# Altium PCB WGPIB.PcbDoc
Units mm, origin at the board's own origin, x right, y up, seen from the top; angles counter-clockwise.
Board outline 64 x 55 mm, 2 copper layers (Top Layer, Bottom Layer); 60 components, 74 nets, 275 pads, 101 vias.
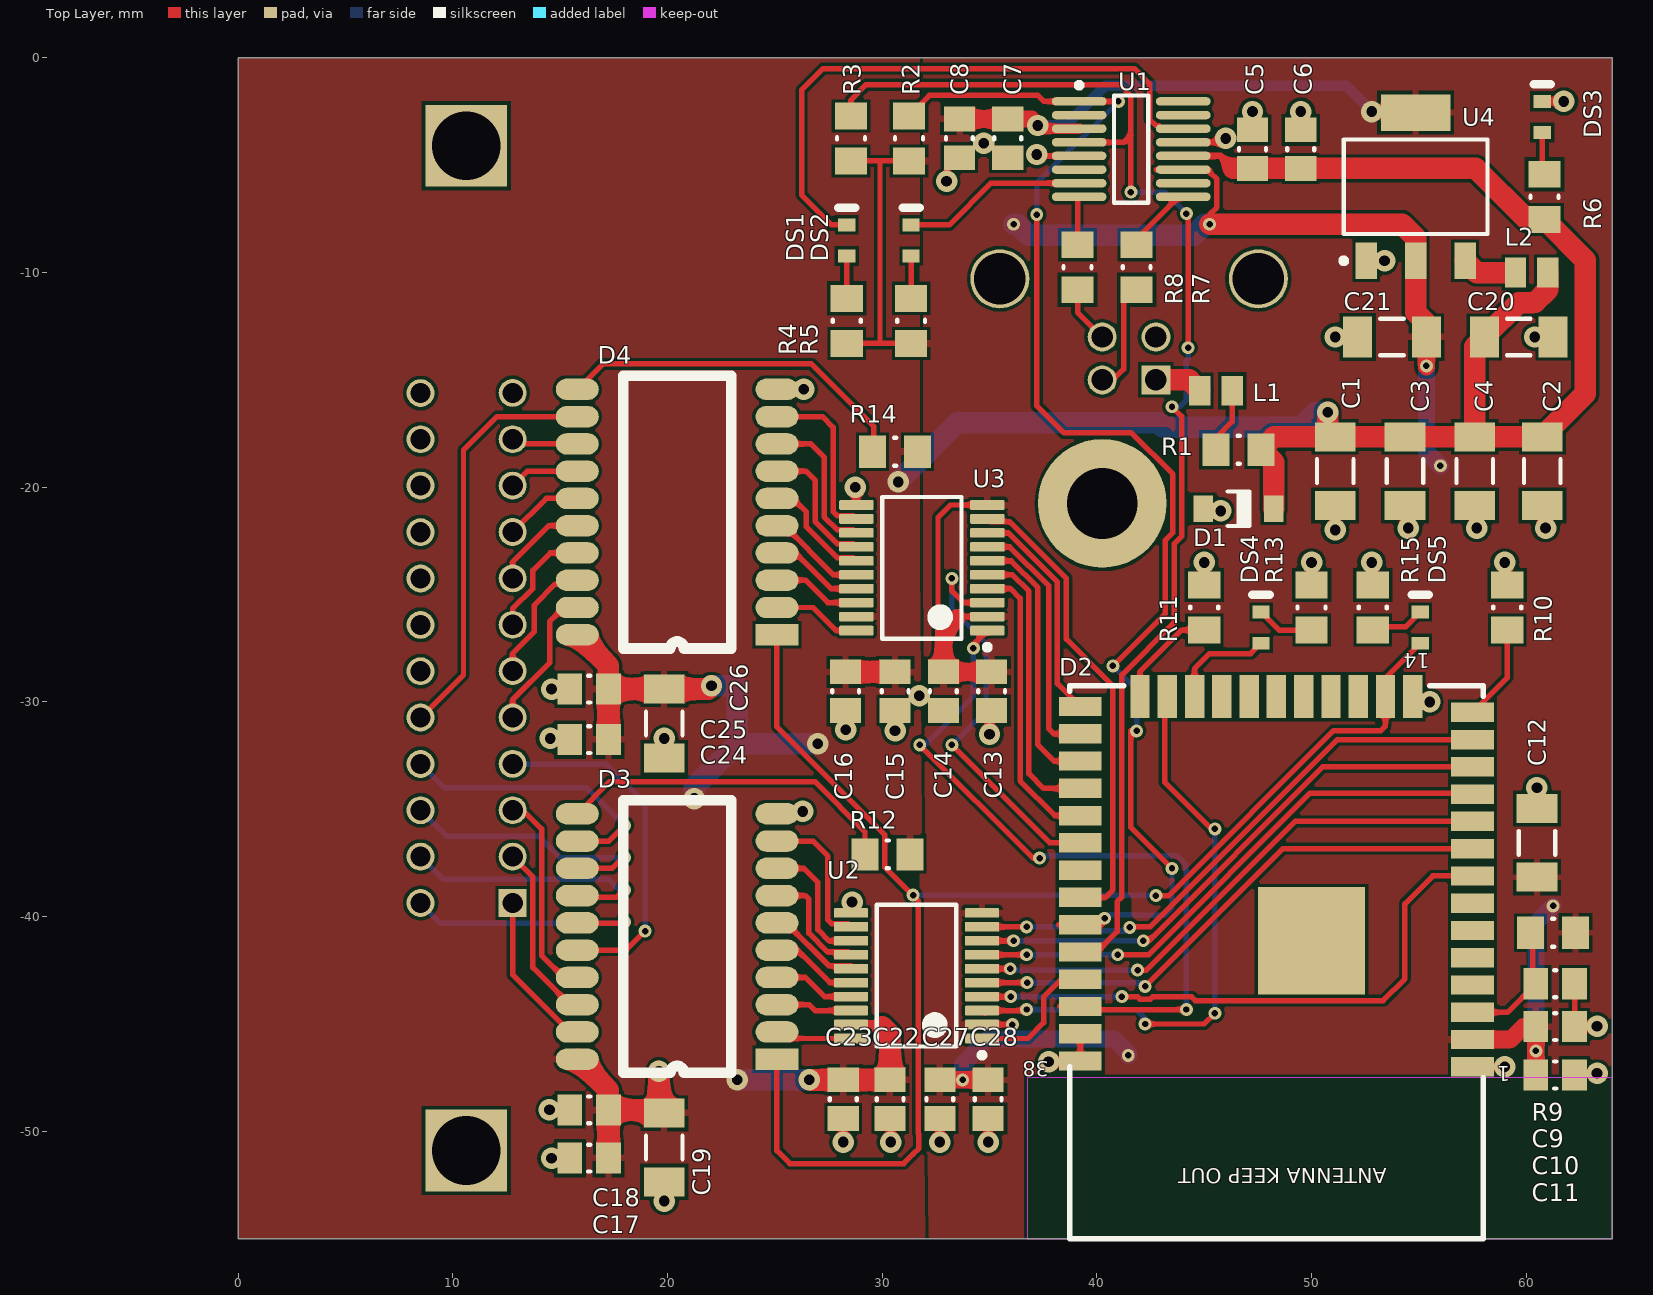
[diagram p0: Top Layer view]
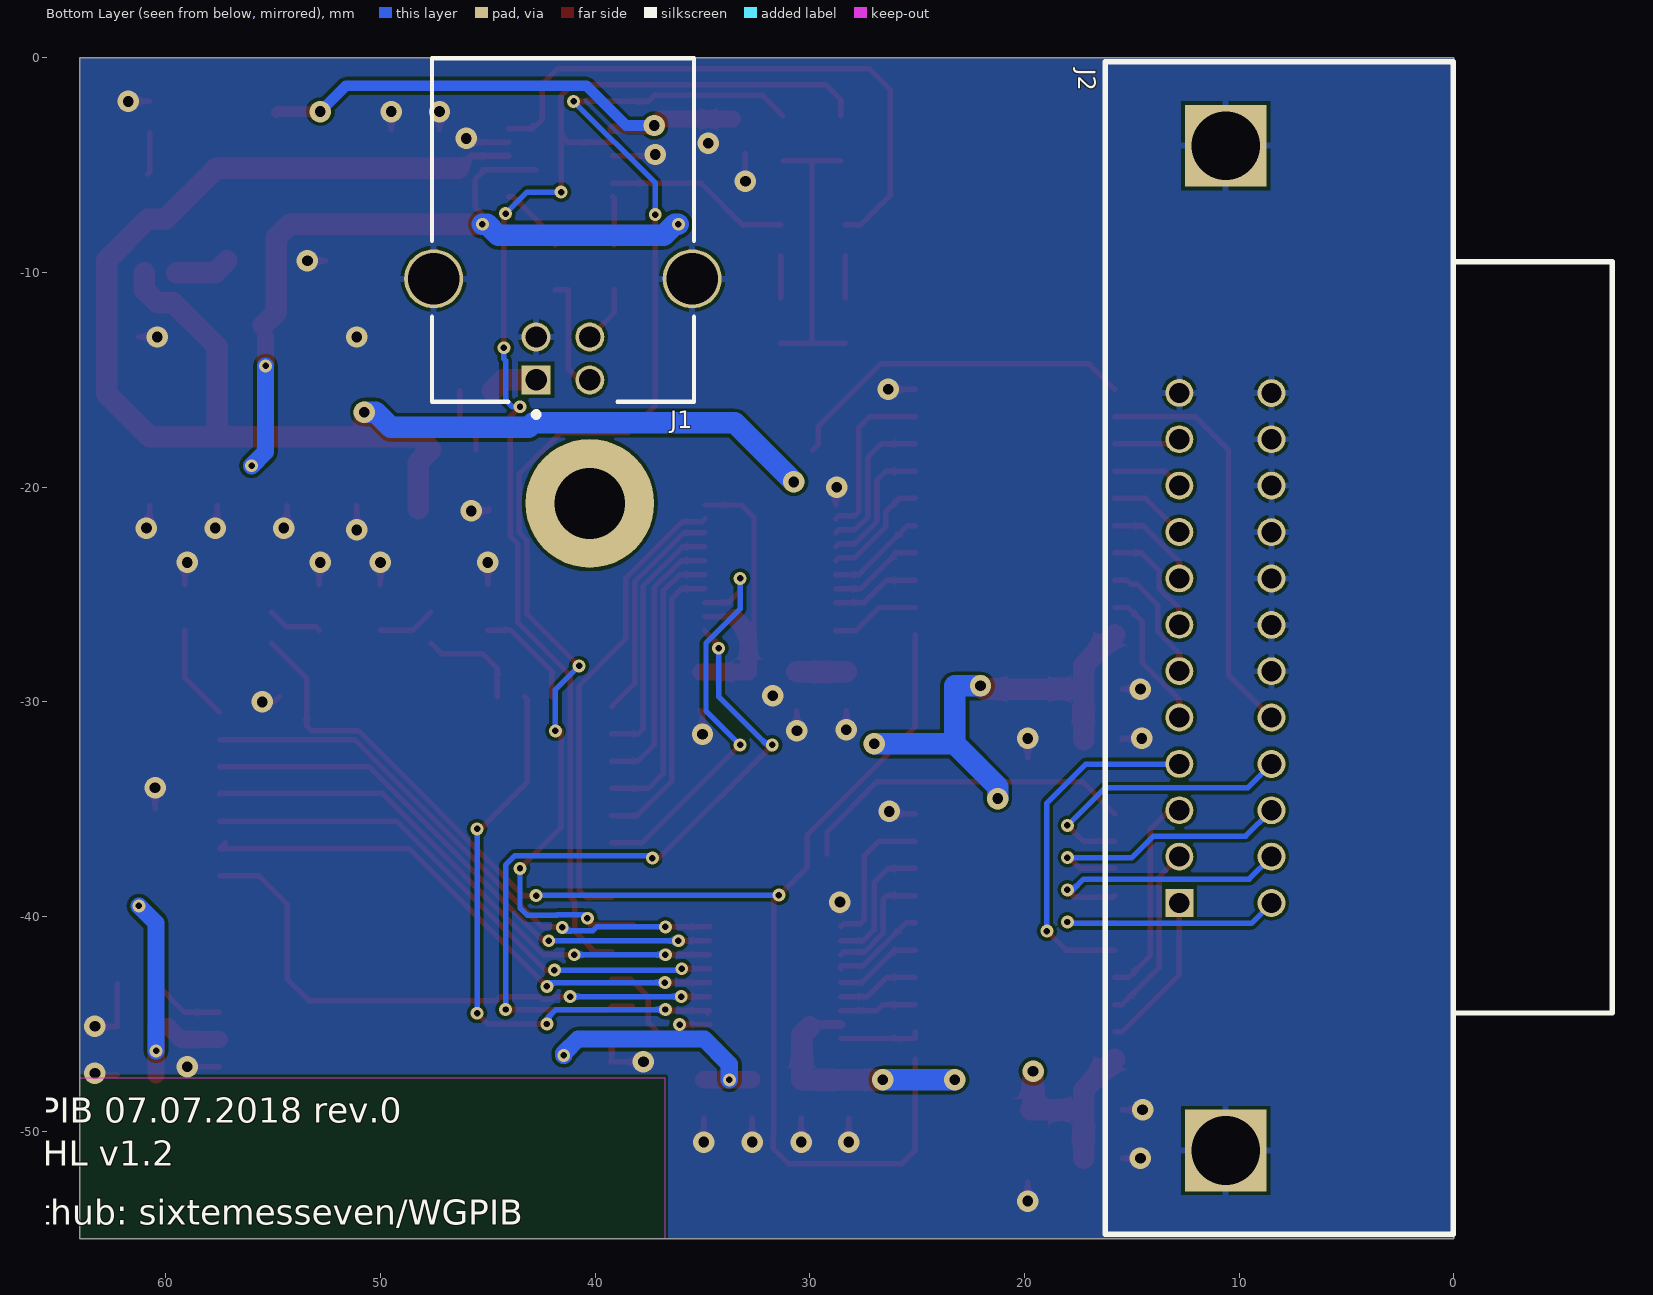
[diagram p1: Bottom Layer view, seen from below]

## Layer stack, top to bottom
Top Solder: solder mask 0.0102, Solder Resist, Dk 3.5
Top Layer: signal copper 0.0356
Dielectric 1: dielectric 0.32, FR-4, Dk 4.8
Bottom Layer: signal copper 0.0356
Bottom Solder: solder mask 0.0102, Solder Resist, Dk 3.5

## Board outline
64,0 64,-55 0,-55 0,0

## Design rules (kind name [scope] priority, off if disabled: settings)
Clearance [All] p1: gap=0.16 ignorepadtopadclearanceinfootprint=FALSE
PolygonConnect [All] p1: thpad.connectstyle=Relief thpad.reliefconductorwidth=0.3 thpad.reliefentries=4 thpad.polygonreliefangle="90 Angle" thpad.airgapwidth=0.16 smdpad.connectstyle=Relief smdpad.reliefconductorwidth=0.3 smdpad.reliefentries=4 smdpad.polygonreliefangle="90 Angle" smdpad.airgapwidth=0.16 via.connectstyle=Direct via.reliefconductorwidth=0.254 via.reliefentries=4 via.polygonreliefangle="90 Angle" via.airgapwidth=0.254
RoutingVias [All] p1: holewidth=0.3 width=0.6 viastyle="Through Hole" minholewidth=0.3 minwidth=0.6 maxholewidth=0.711 maxwidth=1.27
SolderMaskExpansion [All] p1: expansion=0.102
Width [All] p1: maxlimit=5 minlimit=0.254 preferedwidth=0.254
30 further rules are at their usual default settings.

## Classes and differential pairs
component class WGPIB: C9 C10 C11 C12 C13 C14 C15 C16 C17 C18 C19 C20 C21 C22 C23 C24 C25 C26 C27 C28 D2 D3 D4 DS4 DS5 J2 L2 R9 R10 R11 R12 R13 R14 R15 U2 U3 U4
component class D?: C1 C2 C3 C4 C5 C6 C7 C8 D1 DS1 DS2 DS3 J1 L1 R1 R2 R3 R4 R5 R6 R7 R8 U1

## Components (designator, comment, footprint, x,y, rotation, side; value= is the part's Value field where it differs from the comment)
C1 "22uF" CAPC1206(3216)190_M 51.1,-19.25 r90 top
C2 "22uF" CAPC1206(3216)190_M 60.75,-19.25 r90 top
C3 "22uF" CAPC1206(3216)190_M 54.35,-19.25 r90 top
C4 "22uF" CAPC1206(3216)190_M 57.6,-19.25 r90 top
C5 "100nF" CAPC0805(2012)145_N 47.25,-4.25 r270 top
C6 "1uF" CAPC0805(2012)145_N 49.5,-4.25 r270 top value=100nF
C7 "100nF" CAPC0805(2012)145_N 35.85,-3.75 r90 top
C8 "1uF" CAPC0805(2012)145_N 33.6,-3.75 r90 top value=100nF
C9 "100nF" CAPC0805(2012)145_N 61.35,-43.125 r180 top
C10 "100nF" CAPC0805(2012)145_N 61.35,-45.125 r180 top
C11 "1uF" CAPC0805(2012)145_N 61.35,-47.375 r180 top value=100nF
C12 "22uF" CAPC1206(3216)190_M 60.5,-36.564 r270 top
C13 "100nF" CAPC0805(2012)145_N 35.1,-29.5 r90 top
C14 "1uF" CAPC0805(2012)145_N 32.85,-29.5 r90 top value=100nF
C15 "100nF" CAPC0805(2012)145_N 30.6,-29.5 r90 top
C16 "1uF" CAPC0805(2012)145_N 28.3,-29.5 r90 top value=100nF
C17 "100nF" CAPC0805(2012)145_N 16.35,-51.25 r0 top
C18 "1uF" CAPC0805(2012)145_N 16.35,-49 r0 top value=100nF
C19 "22uF" CAPC1206(3216)190_M 19.85,-50.75 r90 top
C20 "22uF" CAPC1206(3216)190_M 59.65,-13 r180 top
C21 "22uF" CAPC1206(3216)190_M 53.75,-13 r0 top
C22 "100nF" CAPC0805(2012)145_N 30.37,-48.5 r90 top
C23 "1uF" CAPC0805(2012)145_N 28.188,-48.5 r90 top value=100nF
C24 "100nF" CAPC0805(2012)145_N 16.35,-31.75 r0 top
C25 "1uF" CAPC0805(2012)145_N 16.35,-29.4 r0 top value=100nF
C26 "22uF" CAPC1206(3216)190_M 19.85,-31 r90 top
C27 "100nF" CAPC0805(2012)145_N 32.687,-48.5 r90 top
C28 "1uF" CAPC0805(2012)145_N 34.937,-48.5 r90 top value=100nF
D1 "MMSD4148T3G" ONSC-SOD123-2-425G-04_V 46.6,-21 r180 top
D2 "ESP-WROOM-32" ESP-WROOM-32 57.498,-46.994 r180 top locked
D3 "SN75160BDWR" SOIC-20 25.1,-46.64 r180 top locked
D4 "SN75160BDWR" SOIC-20 25.1,-26.87 r180 top
DS1 "TLMS1100-GS08" VISH-TLMX1100_V 28.35,-8.5 r90 top
DS2 "TLMS1100-GS08" VISH-TLMX1100_V 31.35,-8.5 r90 top
DS3 "TLMS1100-GS08" VISH-TLMX1100_V 60.75,-2.75 r90 top
DS4 "TLMS1100-GS08" VISH-TLMX1100_V 47.65,-26.54 r90 top
DS5 "TLMS1100-GS08" VISH-TLMX1100_V 55.065,-26.54 r90 top
J1 "61729-0010BLF" FCI-61729-0010BLF-6_V 41.496,-8.01 r0 bottom locked
J2 "GPIB" "GPIB THT" 10.631,-27.489 r90 bottom
L1 "FBMJ2125HM210NT" INDC2013X105X50LL20T30 45.55,-15.501 r0 top
L2 "FBMJ2125HM210NT" INDC2013X105X50LL20T30 60.25,-10 r180 top
R1 "FUSE" RESC0805(2012)_M 46.6,-18.25 r0 top value="33.00 Ohm"
R2 "10k" RESC0805(2012)_M 31.25,-3.75 r270 top value="33.00 Ohm"
R3 "10k" RESC0805(2012)_M 28.55,-3.75 r270 top value="33.00 Ohm"
R4 "330" RESC0805(2012)_M 28.35,-12.25 r270 top value="33.00 Ohm"
R5 "330" RESC0805(2012)_M 31.35,-12.25 r270 top value="33.00 Ohm"
R6 "330" RESC0805(2012)_M 60.85,-6.472 r270 top value="33.00 Ohm"
R7 "33" RESC0805(2012)_M 41.85,-9.75 r90 top value="33.00 Ohm"
R8 "33" RESC0805(2012)_M 39.1,-9.75 r90 top value="33.00 Ohm"
R9 "10k" RESC0805(2012)_M 61.25,-40.75 r0 top value="33.00 Ohm"
R10 "10k" RESC0805(2012)_M 59.12,-25.6 r270 top value="33.00 Ohm"
R11 "10k" RESC0805(2012)_M 45,-25.6 r270 top value="33.00 Ohm"
R12 "10k" RESC0805(2012)_M 30.25,-37.1 r180 top value="33.00 Ohm"
R13 "330" RESC0805(2012)_M 50,-25.6 r270 top value="33.00 Ohm"
R14 "10k" RESC0805(2012)_M 30.6,-18.341 r180 top value="33.00 Ohm"
R15 "330" RESC0805(2012)_M 52.85,-25.6 r270 top value="33.00 Ohm"
U1 "FT230XS-R" SSOP-16_M 41.6,-4.25 r0 top
U2 "TXS0108EPWR" PW0020A_M 31.6,-42.75 r180 top
U3 "TXS0108EPWR" PW0020A_M 31.85,-23.75 r180 top
U4 "LT1117CST-3.3" LT-ST-3-SOT-223_M 54.85,-6 r90 top

## Footprints (in the part's own frame and the unit in brackets; to place one, negate y for a bottom-side part, rotate by r counter-clockwise, add the part's x,y. Pads: shape width x height; smd on the part's side, far side on the other; paste and mask are expansions set on the pad)
CAPC0805(2012)145_N [mm] "Chip Capacitor, Body 2.0x1.2mm, Height 1.45mm, IPC Medium Density"
  rect 1.15x1.45 smd: 1(-0.9,0) 2(0.9,0)
  silkscreen extent -0.05,-0.62 0.05,0.62, body extent -1.1,-0.72 1.1,0.73, height 1.45
CAPC1206(3216)190_M [mm] "Chip Capacitor, Body 3.2x1.6mm, Height 1.9mm, IPC Low Density"
  rect 1.35x1.9 smd: 1(-1.6,0) 2(1.6,0)
  silkscreen extent -0.55,-0.85 0.55,0.85, body extent -1.7,-0.9 1.7,0.9, height 1.9
ESP-WROOM-32 [mm] "OEM_Module"
  rect 2x0.9 smd: 1(0,0) 2(0,-1.27) 3(0,-2.54) 4(0,-3.81) 5(0,-5.08) 6(0,-6.35) 7(0,-7.62) 8(0,-8.89) 9(0,-10.16) 10(0,-11.43) 11(0,-12.7) 12(0,-13.97) 13(0,-15.24) 14(0,-16.51) 26(18.27,-16.78) 27(18.27,-15.51) 28(18.27,-14.24) 29(18.27,-12.97) 30(18.27,-11.7) 31(18.27,-10.43) 32(18.27,-9.16) 33(18.27,-7.89) 34(18.27,-6.62) 35(18.27,-5.35) 36(18.27,-4.08) 37(18.27,-2.81) 38(18.27,-1.54) 39(18.27,-0.27)
  rect 0.9x2 smd: 15(2.785,-17.24) 16(4.055,-17.24) 17(5.325,-17.24) 18(6.595,-17.24) 19(7.865,-17.24) 20(9.135,-17.24) 21(10.405,-17.24) 22(11.675,-17.24) 23(12.945,-17.24) 24(14.215,-17.24) 25(15.485,-17.24)
  rect 5x5 smd mask-2: PAD(7.498,-5.869)
  silkscreen extent -0.5,-17.75 18.75,8
FCI-61729-0010BLF-6_V [mm] "Through Hole, 6-Leads, Body 12.2x16mm"
  rect 1.35x1.35 hole 1: 1(1.254,6.99)
  round 1.35 hole 1: 2(-1.246,6.99) 3(-1.246,4.99) 4(1.254,4.99)
  round 2.75 hole 2.4: MH1(-6.016,2.28) MH2(6.024,2.28)
  silkscreen extent -6.1,-8 6.1,8.72, body extent -7.17,-8 7.17,8, height 11.14
"GPIB THT" [mm] "DXP://VaultExplorer:Navigate_URL?Plugin=Search&VaultGUID=B7D15EC3-160A-466F-A46C-7801FE6295A7&SavedSearchGUID=&GenericFilter=DXP://VaultExplorer:Navigate_URL?VaultGUID=B7D15EC3-160A-466F-A46C-7801FE6295A7&Plugin=Folders&FolderPath=112-024-113r001&Nav_ForceRefresh:=True&UserDefinedBrowseItemsOption_0:=0&UserDefinedBrowseItemsOption_1:=-1&UserDefinedBrows112-024-113r001"
  rect 1.3x1.3 hole 0.94: 1(-11.875,2.159)
  round 1.3 hole 0.94: 2(-9.715,2.159) 3(-7.555,2.159) 4(-5.395,2.159) 5(-3.235,2.159) 6(-1.075,2.159) 7(1.085,2.159) 8(3.245,2.159) 9(5.405,2.159) 10(7.565,2.159) 11(9.725,2.159) 12(11.885,2.159) 13(-11.875,-2.131) 14(-9.716,-2.131) 15(-7.557,-2.131) 16(-5.398,-2.131) 17(-3.239,-2.131) 18(-1.08,-2.131) 19(1.079,-2.131) 20(3.238,-2.131) 21(5.397,-2.131) 22(7.565,-2.131) 23(9.725,-2.131) 24(11.874,-2.131)
  rect 3.81x3.81 hole 3.2: PAD(-23.4,0) PAD(23.4,0)
  silkscreen extent -27.3,-18 27.3,5.6
INDC2013X105X50LL20T30 [mm] "Chip Inductor, 2-Leads, Body 2.2x1.45mm, IPC High Density"
  rect 0.99x1.39 smd: 1(-0.755,0) 2(0.755,0)
  body extent -1.1,-0.72 1.1,0.72, height 1.05
LT-ST-3-SOT-223_M [mm] "SOT223, 4-Leads, Body 6.505x3.505mm, Pitch 2.3mm, IPC Low Density"
  rect 1.7x1 smd: 1(-3.45,2.3) 2(-3.45,0) 3(-3.45,-2.3)
  rect 1.7x3.25 smd: 4(3.45,0)
  silkscreen extent -3.57,-3.35 2.2,3.47, body extent -1.86,-3.35 1.86,3.35, height 1.8
ONSC-SOD123-2-425G-04_V [mm] "SOD123, 2-Leads, Body 2.69x1.6mm, Height 1.35mm"
  rect 0.915x1.22 smd: 1(-1.637,0) 2(1.637,0)
  silkscreen extent -0.5,-0.8 0.5,0.8, body extent -1.35,-0.8 1.35,0.8, height 1.35
PW0020A_M [mm] "SOP, 20-Leads, Body 6.6x4.5mm, Pitch 0.65mm, IPC Low Density"
  rrect22% 1.6x0.45 smd: 1(-3.05,2.925) 2(-3.05,2.275) 3(-3.05,1.625) 4(-3.05,0.975) 5(-3.05,0.325) 6(-3.05,-0.325) 7(-3.05,-0.975) 8(-3.05,-1.625) 9(-3.05,-2.275) 10(-3.05,-2.925) 11(3.05,-2.925) 12(3.05,-2.275) 13(3.05,-1.625) 14(3.05,-0.975) 15(3.05,-0.325) 16(3.05,0.325) 17(3.05,0.975) 18(3.05,1.625) 19(3.05,2.275) 20(3.05,2.925)
  silkscreen extent -3.18,-3.3 1.85,3.82, body extent -3.21,-3.25 3.21,3.25, height 1
RESC0805(2012)_M [mm] "Chip Resistor, Body 2.0x1.3mm, IPC Low Density"
  rect 1.25x1.5 smd: 1(-1.05,0) 2(1.05,0)
  silkscreen extent -0.05,-0.65 0.05,0.65, body extent -1.1,-0.67 1.1,0.67, height 0.7
SOIC-20 [mm]
  rect 2x1 smd: 1(0,0)
  oval 2x1 smd: 2(0,-1.27) 3(0,-2.54) 4(0,-3.81) 5(0,-5.08) 6(0,-6.35) 7(0,-7.62) 8(0,-8.89) 9(0,-10.16) 10(0,-11.43) 11(9.3,-11.43) 12(9.3,-10.16) 13(9.3,-8.89) 14(9.3,-7.62) 15(9.3,-6.35) 16(9.3,-5.08) 17(9.3,-3.81) 18(9.3,-2.54) 19(9.3,-1.27) 20(9.3,0)
  silkscreen extent 2.13,-12.07 7.17,0.64
SSOP-16_M [mm] "SOP, 16-Leads, Body 4.9x3.9mm, Pitch 0.635mm, IPC Low Density"
  oval 2.55x0.4 smd: 1(-2.425,2.223) 2(-2.425,1.588) 3(-2.425,0.953) 4(-2.425,0.318) 5(-2.425,-0.317) 6(-2.425,-0.952) 7(-2.425,-1.587) 8(-2.425,-2.222) 9(2.425,-2.222) 10(2.425,-1.587) 11(2.425,-0.952) 12(2.425,-0.317) 13(2.425,0.318) 14(2.425,0.953) 15(2.425,1.588) 16(2.425,2.223)
  silkscreen extent -2.55,-2.5 0.8,3.1, body extent -1.99,-2.5 1.99,2.5, height 1.76
VISH-TLMX1100_V [mm] "SMD, 2-Leads, Body 1.6x0.8mm"
  rect 0.6x0.8 smd: 1(-0.725,0) 2(0.725,0)
  silkscreen extent 1.53,-0.4 1.53,0.4, body extent -0.8,-0.4 0.8,0.4, height 0.65

## Part data
C1 C2 C3 C4 C12 C19 C20 C21 C26: library part CMP-1037-04993-1, Case-EIA=1206, Case-Metric=3216, Rated Voltage="16 V", Tolerance=±20%, Max Thickness="1.9 mm", Technology=SMT
C5 C6 C7 C8 C9 C10 C11 C13 C14 C15 C16 C17 C18 C22 C23 C24 C25 C27 C28: library part CMP-1036-04431-1, Case-EIA=0805, Case-Metric=2012, Rated Voltage="100 V", Tolerance=±20%, Max Thickness="1.45 mm", Technology=SMT
D1: library part CMP-0895-00002-1, Manufacturer="ON Semiconductor", Temperature Range="-55 to 150 degC", CD (Max)="4 pF", ComponentLink1Description="Manufacturer URL", ComponentLink1URL=http://www.onsemi.com/, ComponentLink2Description=Datasheet, ComponentLink2URL=http://www.onsemi.com/pub_link/Collateral/MMSD4148T1-D.PDF, ComponentLink3Description="Package Specification", ComponentLink3URL=http://www.onsemi.com/pub_link/Collateral/425-04.PDF, DatasheetVersion="Rev. 11", IR @ VR="75 V (Max)=50 uA", Mounting Technology="Surface Mount", PackageDescription="2-Pin SOD123, Body 2.69 x 1.6 mm, Height 1.35 mm", PackageReference=SOD123-2-425G-04, PackageVersion="Rev. 04G", Packing="Tape and Reel", PartNumber=MMSD4148T3G, PD (Max)="425 mW", RoHS=TRUE, Trr (Max)="4 ns", VBR (Min)="100 V", VF (Max)="1 A"
D2: "ESP32 Module"
DS1 DS2 DS3 DS4 DS5: library part CMP-1666-00027-1, "LED, RED, 2.1 V, -40 to 100 degC, 2-Pin SMD (0603), RoHS, Tape and Reel", Capacitance="12 pF", Case/Package=0603, Case Code (Metric)=1608, Max Operating Temperature=125degC, Min Operating Temperature=-55degC, Package Quantity=4000, Resistance="100000000000 Ohm", Tolerance=5%, Type (Capacitors)=C0G, Voltage Rating="50 V", Case Code (Imperial)=0603, ComponentLink1Description="Manufacturer URL", ComponentLink1URL=http://www.vishay.com/, ComponentLink2Description=Datasheet, ComponentLink2URL=http://www.vishay.com/docs/83173/tlmb1100.pdf, DatasheetVersion="Rev. 2.7, 03/2016", Height="0.8 mm", Length="1.6 mm", Mount="Surface Mount", PackageDescription="2-Pin Surface Mount Device, Body 1.6 x 0.8 mm", PackageReference=TLMX1100, Packaging="Tape and Reel", Pins=2, Radiation Hardening=No, REACH SVHC="No SVHC", RoHSCompliant=True, Voltage Rating (DC)="50 V", Width="0.8 mm"
J1: library part CMP-0397-00002-2, "Single USB 2.0, B Type, Right Angle Jack, Through Hole, RoHS, Tube", Manufacturer="FCI Electronics", ComponentLink1Description="Manufacturer URL", ComponentLink1URL=http://portal.fciconnect.com/, ComponentLink2Description=Datasheet, ComponentLink2URL=http://portal.fciconnect.com/Comergent//fci/drawing/61729.pdf, ComponentLink3Description="Package Specification", ComponentLink3URL=http://portal.fciconnect.com/Comergent//fci/drawing/61729.pdf, Connector Type=USB-B, DatasheetVersion="Rev. V", Gender=Receptacle, Mounting Technology="Through Hole", Number of Contacts=4, PackageDescription="6-Pin, Through Hole, Body 12.2 x 16 mm", PackageReference=61729-0010BLF, Packing=Tube, PartNumber=61729-0010BLF, RoHS=TRUE, Specifications="USB 2.0"
J2: "112-024-113R001"
L1 L2: library part CMP-1660-00003-1, "Chip Inductor, 21 Ohm, +/- 30%, 6 A, -40 to 125 degC, 0805 (2012 Metric), RoHS, Tape and Reel", Case\Package=0805, Case Code (Metric)=2012, Current Rating="6 A", Max Operating Temperature="125 degC", Min Operating Temperature="-40 degC", Package Quantity=1, Resistance="4 mohm", Tolerance=30%, Case Code (Imperial)=0805, ComponentLink1Description="Manufacturer URL", ComponentLink1URL=http://www.t-yuden.com/, ComponentLink2Description=Datasheet, ComponentLink2URL=http://ds.yuden.co.jp/TYCOMPAS/ut/detail.do?productNo=FBMJ2125HM210NT&fileName=FBMJ2125HM210NT_SS&mode=specSheetDownload, Core Material=Ferrite, DatasheetVersion=08/2016, Height="0.85 mm", Impedance="21 Ohm", Length="2 mm", Max Current Rating="6 A", Mount="Surface Mount", Mounting Technology="Surface Mount", PackageDescription="2-Pin Surface Mount Device, Body 2 x 1.25 mm", PackageReference=0805, Packaging="Tape and Reel", REACH SVHC=Unknown, RoHSCompliant=true, Width="1.25 mm"
R1 R2 R3 R4 R5 R6 R7 R8 R9 R10 R11 R12 R13 R14 R15: library part CMP-1013-00038-1, Case-EIA=0805, Case-Metric=2012, Power="0.125 W", Tolerance="5 %", Technology=SMT
U1: library part CMP-0248-00026-2, "USB to Basic UART Interface Chip, UHCI/OHCI/EHCI Compatible, USB 2.0 Compatible, -40 to +85 degC, 16-Pin SSOP, Pb-Free, Tape and Reel", Manufacturer=FTDI, Code_JEDEC=MO-137-AB, ComponentLink1Description="Manufacturer URL", ComponentLink1URL=http://www.ftdichip.com/, ComponentLink2Description=Datasheet, ComponentLink2URL=http://www.ftdichip.com/Support/Documents/DataSheets/ICs/DS_FT230X.pdf, ComponentLink3Description="FT230X Product Page", ComponentLink3URL=www.ftdichip.com/Products/ICs/FT230X.html, DatasheetVersion="ver 1.2, Feb-2013", PackageDescription="16-Pin Small Outline Package, 8.6 x 3.9 mm Body, 0.635 mm Pitch", PackageReference=SSOP-16, PackageVersion=Feb-13, PartNumber=FT230XS-R, RevisionNote="DatasheetVersion updated to 1.2 Feb-2013"
U2 U3: library part CMP-2000-04956-1, "Bidirectional Voltage-Level Translator for Open-Drain and Push-Pull Application, 8 bit, 1.2 to 3.6 V, -40 to 85 degC, 20-Pin TSSOP, Green (RoHS & no Sb/Br), Tape and Reel", Logic Case Style=TSSOP, Manufacturer="Texas Instruments", Operating Temperature Max=85degC, Operating Temperature Min=-40degC, Output Current=620µA, Supply Voltage Max=5.5V, Supply Voltage Min=1.2V, Datasheet URL=https://datasheet.ciiva.com/14287/txs0108e-14287280.pdf, Datasheet Version="Rev. B, 09/2008", Logic Type=VoltageLevelTranslator, Manufacturer URL=http://www.ti.com/, MSL=MSL1-Unlimited, No. of Inputs=8, No. of Pins=20, Packaging=CutTape, Propagation Delay=4.8ns, SVHC=NoSVHC(16-Jun-2014)
U4: library part CMP-0476-01817-1, "0.8 A Low Dropout Positive Regulator, 2.45 to 15 V Vin, 3.3 V Vout, 3-pin SOT223 (ST-3), 0 to 125 degC", Dropout Voltage(V)=1.1, Manufacturer="Linear Technology", Output Voltage="3.3 V", ComponentLink1Description="Manufacturer URL", ComponentLink1URL=http://www.linear.com/, ComponentLink2Description=Datasheet, ComponentLink2URL=http://cds.linear.com/docs/en/datasheet/1117fd.pdf, ComponentLink3Description="Package Specification", ComponentLink3URL=http://cds.linear.com/docs/en/packaging/SOT_3_05-08-1630.pdf, DatasheetVersion="Rev. D", Discrete Pass Element=no, Iout(mA)=800, Isupply(mA)=5, Mounting Technology="Surface Mount", Number of Outputs=1, PackageDescription="3-Pin Plastic SOT-223, 3.505 x 6.505 mm Body, Pitch 2.3 mm", PackageReference=ST-3, PackageVersion=Jun-10, PartNumber=LT1117CST-3.3, PSRR(dB)=75, RoHS=FALSE, Vin Max(V)=15, Vin Min(V)=2.45

## Free pads (board coordinates)
  round 6 hole 3.3: 41(40.25,-20.75)

## Via types
v1: diameter 1, hole 0.5, Top Layer to Bottom Layer, tented both sides, 53 vias
v2: diameter 0.6, hole 0.3, Top Layer to Bottom Layer, tented both sides, 33 vias
v3: diameter 0.6, hole 0.3, Top Layer to Bottom Layer, 15 vias

## Nets (pads, with @x,y where several pads share a name; then routed paths per layer and width w, separated by ;. In a path a pad name is that pad's centre, name@x,y a point inside that pad or via, vN(x,y) a via of type N, cw(c..) or ccw(c..) an arc to the next point about the centre after c; other vN are vias at no path point)
3.3V: C7.2 C8.2 C10.2 C11.2 C12.2 C13.2 C14.2 C21.2 C27.2 C28.2 D2.2 R2.2 R3.2 R4.2 R5.2 R9.2 U1.3 U1.11 U2.2 U2.10 U3.2 U3.10 U4.2 U4.4 | length 114.2
  Top Layer w0.254: R4.2 29.9,-13.3 ; R3.2 29.9,-4.8 ; R2.2 29.9,-4.8 ; R5.2 29.9,-13.3 ; 32.85,-26.715 32.6,-26.464 32.6,-21.4 33.175,-20.825 U3.10 ; 33.5,-26.065 33.54,-26.025 U3.2 ; U2.2 v2(36.069,-45.025) ; U1.11@42.773,-5.202 U1.11 45.22,-5.202 45.25,-5.233 45.25,-5.35 45.302,-5.35 45.587,-5.636 45.587,-6.959 45.25,-7.296 v3(45.25,-7.75) ; 29.9,-13.3 29.9,-4.8
  Top Layer w0.5: v1(37.25,-3.149) 37.398,-3.297 U1.3 ; v1(52.8,-2.5) 54.8,-2.5 U4.4
  Top Layer w0.8: C27.2 v3(33.75,-47.6) C28.2 ; 33.5,-26.065 32.85,-26.715 C14.2 C13.2 ; C8.2 C7.2 36.95,-2.85 v1(37.25,-3.149) ; v3@55.35,-14.4 v3(55.35,-14.35) C21.2 ; D2.2 59.276,-45.724 59.875,-45.125 C10.2 v3(60.45,-46.25) C11.2
  Top Layer w1: v3(45.25,-7.75) 54.227,-7.75 54.85,-8.372 U4.2 54.85,-11.86 C21.2@55.45,-12.46
  Bottom Layer w0.254: v2(36.069,-45.025) v2@36.131,-45.087
  Bottom Layer w0.5: v1(37.25,-3.149) 38.55,-3.149 40.4,-1.3 51.6,-1.3 v1(52.8,-2.5)
  Bottom Layer w0.8: v3(33.75,-47.6) 33.75,-46.873 34.921,-45.702 40.801,-45.702 41.46,-46.361 v3(41.46,-46.46) ; v3(55.35,-14.35) 55.35,-18.35 v3(56,-19) ; v3(60.45,-46.25) 60.45,-40.3 v3(61.25,-39.5)
  Bottom Layer w1: v3(36.125,-7.75) 36.292,-7.75 36.802,-8.26 44.522,-8.26 45.032,-7.75 v3(45.25,-7.75)
5V: C1.2 C2.2 C3.2 C4.2 C5.2 C6.2 C15.2 C16.2 C17.2 C18.2 C19.2 C20.2 C22.2 C23.2 C24.2 C25.2 C26.2 D1.1 D3.20 D4.20 L2.1 R1.2 R6.2 R12.1 R14.1 U1.12 U2.19 U3.19 | length 122.9
  Top Layer w0.3: U1.12 45.767,-4.567 46.35,-5.15
  Top Layer w0.4: U2.19 29.9,-45.025 30,-45.125
  Top Layer w1: D3.20 17.25,-48.09 C18.2 ; D4.20 17.25,-28.32 C25.2 ; C17.2 C18.2 ; C24.2 C25.2 ; v1(19.6,-47.2) 19.6,-48.9 19.7,-49 C18.2 ; v1(22.05,-29.25) 21.9,-29.4 C26.2 C25.2 ; v1(26.6,-47.6) C23.2 C22.2 30.37,-45.495 30,-45.125 ; C16.2 C15.2 ; 46.35,-5.15 C5.2 C6.2 57.65,-5.15 60.023,-7.523 R6.2 62.75,-9.422 62.75,-15.65 C2.2 C4.2 ; D1.1 48.237,-18.838 R1.2 48.25,-17.65 C1.2 ; v1(50.75,-16.5) 50.75,-17.3 C1.2 ; L2.1 61.005,-10.795 60.41,-11.39 60.302,-11.39 60.292,-11.4 59.65,-11.4 C20.2 57.6,-13.45 C4.2 ; C1.2 C3.2 C4.2
  Bottom Layer w1: v1(21.25,-34.5) 21.25,-33.95 23.25,-31.95 ; v1(22.05,-29.25) 23.25,-29.25 23.25,-31.95 ; v1(23.25,-47.6) v1(26.6,-47.6) ; v1(27,-31.95) 23.25,-31.95 ; v1(30.75,-19.75) 33.5,-17 42.892,-17 43.102,-17.21 49.513,-17.21 50.223,-16.5 v1(50.75,-16.5)
ATN: D2.26 U3.8 | length 10.5
  Top Layer w0.254: U3.8 35.875,-22.125 38.164,-24.414 38.164,-29.15 D2.26
DAV: D2.31 U3.3 | length 19.4
  Top Layer w0.254: v2(33.25,-32) 37.814,-36.564 D2.31 ; v2(33.25,-24.243) 33.25,-24.842 33.783,-25.375 U3.3
  Bottom Layer w0.254: v2(33.25,-32) 34.837,-30.413 34.837,-27.257 33.25,-25.67 v2(33.25,-24.243)
DIO1: D2.36 U2.1 | length 6.5
  Top Layer w0.254: U2.1@34.725,-45.75 U2.1 36.787,-45.675 37.524,-44.938 37.524,-43.75 38.36,-42.914 D2.36
DIO2: D2.24 U2.3 | length 27.5
  Top Layer w0.254: U2.3@34.775,-44.5 U2.3 36.676,-44.375 v2(36.725,-44.326) ; v2(42.25,-45) 45,-45 v2(45.5,-44.5) ; D2.24 43.163,-29.874 43.163,-33.743 45.334,-35.914 v2(45.5,-35.914)
  Bottom Layer w0.254: v2(36.725,-44.326) 41.826,-44.326 42.25,-44.75 v2(42.25,-45) ; v2(45.5,-44.5) v2(45.5,-35.914)
DIO3: D2.8 U2.4 | length 27.4
  Top Layer w0.254: U2.4 v2(35.99,-43.725) ; v2(41.164,-43.725) 41.178,-43.739 41.91,-43.739 42.008,-43.837 42.494,-43.837 42.592,-43.739 44.417,-43.739 44.59,-43.912 53.338,-43.912 54.35,-42.9 54.35,-39.4 55.646,-38.104 D2.8
  Bottom Layer w0.254: v2@36.061,-43.725 v2(41.164,-43.725)
DIO4: D2.9 U2.5 | length 26
  Top Layer w0.254: U2.5 v2(36.75,-43.075) ; v2(42.251,-43.25) 48.667,-36.834 D2.9 D2.9@57.228,-36.564
  Bottom Layer w0.254: v2(36.75,-43.075) 42.076,-43.075 v2(42.251,-43.25)
DIO5: D2.10 U2.6 | length 25.8
  Top Layer w0.254: U2.6 v2(35.965,-42.425) ; v2(41.897,-42.488) 41.897,-42.5 42.294,-42.5 49.23,-35.564 D2.10
  Bottom Layer w0.254: v2(35.965,-42.425) 36.028,-42.488 37.337,-42.488 v2(41.897,-42.488)
DIO6: D2.11 U2.7 | length 26
  Top Layer w0.254: U2.7 v2(36.725,-41.775) ; v2(40.975,-41.775) 42.411,-41.775 49.936,-34.25 57.454,-34.25 D2.11
  Bottom Layer w0.254: v2(36.725,-41.775) v2(40.975,-41.775)
DIO7: D2.12 U2.8 | length 26.2
  Top Layer w0.254: U2.8 v2(36.125,-41.125) ; v2(42.16,-41.125) 42.42,-41.125 50.521,-33.024 D2.12
  Bottom Layer w0.254: v2(36.125,-41.125) v2(42.16,-41.125)
DIO8: D2.13 U2.9 | length 26.6
  Top Layer w0.254: U2.9 v2(36.725,-40.475) ; v2(41.534,-40.5) 41.559,-40.475 42.484,-40.475 51.206,-31.754 D2.13
  Bottom Layer w0.254: v2(36.725,-40.475) 39.929,-40.475 40.116,-40.662 41.372,-40.662 v2(41.534,-40.5)
EN: C9.2 D2.3 R9.1 | length 5.6
  Top Layer w0.254: D2.3 59.121,-44.454 C9.2 60.3,-42.975 R9.1@60.3,-41.125
EOI: D2.37 U3.1 | length 38
  Top Layer w0.254: v2(31.75,-32) 37.025,-37.275 v2(37.337,-37.275) ; v2(34.25,-27.5) 34.25,-27.325 U3.1 ; D2.37@38.273,-44.184 D2.37 39.37,-44.326 v2(44.174,-44.326)
  Bottom Layer w0.254: v2(31.75,-32) 31.75,-32.1 v2@31.825,-32.175 ; v2(34.25,-27.5) 34.25,-29.75 ; v2(37.337,-37.275) 37.449,-37.163 43.743,-37.163 44.174,-37.594 v2(44.174,-44.326) ; v2@31.825,-32.175 v2@31.875,-32.125 ; v2@31.825,-32.175 v2@31.875,-32.125 ; v2@31.825,-32.175 v2@31.875,-32.125 ; v2@31.875,-32.125 34.25,-29.75 ; v2@31.875,-32.125 34.25,-29.75
GND: C1.1 C2.1 C3.1 C4.1 C5.1 C6.1 C7.1 C8.1 C9.1 C10.1 C11.1 C12.1 C13.1 C14.1 C15.1 C16.1 C17.1 C18.1 C19.1 C20.1 C21.1 C22.1 C23.1 C24.1 C25.1 C26.1 C27.1 C28.1 D1.2 D2.1 D2.15 D2.38 D2.39 D3.10 D4.10 DS3.2 J1.4 J1.MH1 J1.MH2 J2.12 J2.18 J2.19 J2.20 J2.21 J2.22 J2.23 J2.24 J2.PAD R10.1 R11.1 R13.1 R15.1 U1.5 U1.13 U2.11 U3.11 U4.1 | length 47
  Top Layer w0.254: v1@14.5,-51.25 v1(14.6,-51.25) C17.1 ; v1(14.5,-49) C18.1 ; v1(14.54,-31.7) 15.45,-31.7 C24.1 ; v1(14.6,-29.4) C25.1 ; v1(19.85,-53.25) C19.1 ; C26.1 v1(19.85,-31.7) ; D3.10 26.3,-35.21 v1(26.3,-35.1) ; D4.10 v1(26.35,-15.44) ; v1(28.187,-50.5) C23.1 ; v1(28.3,-31.3) C16.1 ; U2.11 28.55,-39.37 v1(28.6,-39.32) ; v1(28.75,-20) 28.8,-20.05 U3.11 ; C22.1 30.4,-49.4 v1(30.4,-50.5) ; v1(30.6,-31.34) C15.1 ; v1(32.688,-50.5) C27.1 ; v1(33,-5.75) C8.1@33,-4.45 ; v1(34.937,-50.5) C28.1 ; v1(35,-31.5) 35,-30.554 34.973,-30.527 C13.1 ; v1(37.2,-4.5) 37.267,-4.567 U1.5 ; v1(37.75,-46.762) 39.266,-46.762 D2.39 D2.38 ; U1.13 45.817,-3.932 v1(46,-3.75) ; D1.2 44.963,-21.1 v1(45.767,-21.1) ; R11.1 v1(45,-23.5) ; C5.1 v1(47.25,-2.5) ; C6.1 v1(49.5,-2.5) ; R13.1 v1(50,-23.5) ; v1(51.1,-21.987) C1.1 ; v1(51.1,-13) v1@51.1,-12.91 ; U4.1 v1(53.4,-9.45) ; v1(52.8,-23.5) 52.85,-23.55 R15.1 ; C3.1 54.35,-21.9 v1(54.5,-21.9) ; D2.15 54.959,-30 v1(55.5,-30) ; D2.1 v1(59,-46.994) ; C4.1 57.6,-21.9 v1(57.7,-21.9) ; v1(59,-23.5) 59.02,-23.5 59.12,-23.6 R10.1 ; v1(60.4,-13) C20.1 ; C12.1 v1(60.5,-34) ; C2.1 60.75,-21.9 v1(60.9,-21.9) ; DS3.2 60.752,-2.027 v1(61.75,-2.027) ; C11.1 63.3,-47.375 v1(63.3,-47.3) ; C9.1 C10.1 63.3,-45.125 v1(63.3,-45.1)
  other v1: 31.725,-29.708 34.727,-3.972
IFC: D2.28 U3.6 | length 12.5
  Top Layer w0.254: U3.6 36.004,-23.425 37.25,-24.671 37.25,-32 38.004,-32.754 D2.28
NDAC: D2.29 U3.5 | length 13.4
  Top Layer w0.254: U3.5 36.069,-24.075 36.836,-24.842 36.836,-33.336 37.524,-34.024 D2.29
NetD2_14: D2.14 R10.2 | length 4.5
  Top Layer w0.254: D2.14 59.12,-28.862 R10.2
NetD2_23: D2.23 DS4.1 | length 4.9
  Top Layer w0.254: D2.23 44.553,-28.447 45.25,-27.75 47.165,-27.75 DS4.1
NetD2_25: D2.25 R11.2 | length 5
  Top Layer w0.254: D2.25 42.013,-28.579 43.942,-26.65 R11.2
NetD3_2: D3.2 U2.20 | length 3.8
  Top Layer w0.254: D3.2 25.1,-45.675 U2.20
NetD3_3: D3.3 U2.18 | length 3.6
  Top Layer w0.254: D3.3 26.6,-44.1 26.875,-44.375 U2.18
NetD3_4: D3.4 U2.17 | length 3.8
  Top Layer w0.254: D3.4 26.43,-42.83 27.325,-43.725 U2.17
NetD3_5: D3.5 U2.16 | length 4.1
  Top Layer w0.254: D3.5 26.053,-41.56 27.568,-43.075 U2.16
NetD3_6: D3.6 U2.15 | length 4.4
  Top Layer w0.254: D3.6 25.519,-40.29 27.516,-42.287 28.55,-42.287 U2.15
NetD3_7: D3.7 U2.14 | length 5.5
  Top Layer w0.254: D3.7 26.42,-39.02 26.586,-39.186 26.586,-40.771 27.452,-41.637 28.412,-41.637 U2.14
NetD3_8: D3.8 U2.13 | length 6.1
  Top Layer w0.254: D3.8 26.35,-37.75 27,-38.4 27,-40.6 27.525,-41.125 U2.13
NetD3_9: D3.9 U2.12 | length 6.9
  Top Layer w0.254: D3.9 26.78,-36.48 27.475,-37.175 27.475,-39.388 27.463,-39.4 27.463,-40.14 27.66,-40.337 28.412,-40.337 U2.12
NetD3_11: D3.11 R12.2 | length 16
  Top Layer w0.254: D3.11 17.297,-33.713 26.863,-33.713 29.2,-36.05 R12.2
NetD3_12: D3.12 J2.16 | length 13.2
  Top Layer w0.254: D3.12 17.27,-36.48 v2(18,-35.75)
  Bottom Layer w0.254: J2.16@8.5,-32.895 9.605,-34 16.25,-34 v2(18,-35.75)
NetD3_13: D3.13 J2.15 | length 12.8
  Top Layer w0.254: D3.13 17.425,-37.75 17.925,-37.25 v2(18,-37.25)
  Bottom Layer w0.254: J2.15@8.5,-35.054 9.696,-36.25 14,-36.25 15,-37.25 v2(18,-37.25)
NetD3_14: D3.14 J2.14 | length 12.5
  Top Layer w0.254: D3.14 15.884,-39.104 17.646,-39.104 v2(18,-38.75)
  Bottom Layer w0.254: J2.14@8.5,-37.213 9.537,-38.25 17.25,-38.25 17.75,-38.75 v2(18,-38.75)
NetD3_15: D3.15 J2.13 | length 12.3
  Top Layer w0.254: D3.15 15.819,-40.309 v2@18.021,-40.309 ; v2(18,-40.25) v2@18.04,-40.29
  Bottom Layer w0.254: J2.13@8.5,-39.372 9.437,-40.309 17.941,-40.309 v2(18,-40.25) v2@18.04,-40.29
NetD3_16: D3.16 J2.4 | length 16.4
  Top Layer w0.254: D3.16 18.074,-41.56 v2(18.962,-40.672)
  Bottom Layer w0.254: J2.4@12.79,-32.892 17.142,-32.892 18.962,-34.712 v2(18.962,-40.672)
NetD3_17: D3.17 J2.3 | length 9.7
  Top Layer w0.254: J2.3@12.79,-35.052 13.279,-35.052 14.141,-35.914 14.141,-41.805 15.166,-42.83 D3.17
NetD3_18: D3.18 J2.2 | length 8.3
  Top Layer w0.254: J2.2@12.79,-37.212 13.727,-38.149 13.727,-42.37 15.457,-44.1 D3.18
NetD3_19: D3.19 J2.1 | length 7.4
  Top Layer w0.254: J2.1@12.79,-39.372 12.79,-42.703 15.457,-45.37 D3.19
NetD4_2: D4.2 U3.20 | length 4.1
  Top Layer w0.254: D4.2 26.785,-25.6 27.86,-26.675 U3.20
NetD4_3: D4.3 U3.18 | length 4.1
  Top Layer w0.254: D4.3 26.43,-24.33 27.475,-25.375 U3.18
NetD4_4: D4.4 U3.17 | length 4.4
  Top Layer w0.254: D4.4 25.96,-23.06 27.625,-24.725 U3.17
NetD4_5: D4.5 U3.16 | length 4.6
  Top Layer w0.254: D4.5 25.443,-21.79 27.728,-24.075 U3.16
NetD4_6: D4.6 U3.15 | length 5.3
  Top Layer w0.254: D4.6 25.83,-20.52 26.471,-21.161 26.471,-21.848 27.91,-23.287 28.662,-23.287 U3.15
NetD4_7: D4.7 U3.14 | length 6.3
  Top Layer w0.254: D4.7 26.45,-19.25 26.885,-19.685 26.885,-21.612 27.91,-22.637 28.662,-22.637 U3.14
NetD4_8: D4.8 U3.13 | length 7
  Top Layer w0.254: D4.8 26.68,-17.98 27.299,-18.599 27.299,-21.376 27.91,-21.987 28.662,-21.987 U3.13
NetD4_9: D4.9 U3.12 | length 8
  Top Layer w0.254: D4.9 27.21,-16.71 27.713,-17.213 27.713,-21.14 27.91,-21.337 28.662,-21.337 U3.12
NetD4_11: D4.11 R14.2 | length 16.7
  Top Layer w0.254: D4.11 16.99,-14.25 26.7,-14.25 29.607,-17.157 29.607,-18 R14.2@29.857,-18.25
NetD4_12: D4.12 J2.17 | length 19.2
  Top Layer w0.254: J2.17@8.5,-30.736 10.5,-28.736 10.5,-18.272 12.062,-16.71 D4.12
NetD4_13: D4.13 J2.11 | length 3.1
  Top Layer w0.254: J2.11@12.79,-17.772 12.998,-17.98 D4.13
NetD4_14: D4.14 J2.10 | length 3.3
  Top Layer w0.254: J2.10@12.79,-19.932 13.472,-19.25 D4.14
NetD4_15: D4.15 J2.9 | length 3.7
  Top Layer w0.254: J2.9@12.79,-22.092 14.362,-20.52 D4.15
NetD4_16: D4.16 J2.8 | length 4.5
  Top Layer w0.254: J2.8@12.79,-24.252 12.79,-23.472 14.472,-21.79 D4.16
NetD4_17: D4.17 J2.7 | length 5.3
  Top Layer w0.254: J2.7@12.79,-26.412 12.79,-25.654 13.727,-24.718 13.727,-23.873 14.54,-23.06 D4.17
NetD4_18: D4.18 J2.6 | length 6
  Top Layer w0.254: J2.6@12.79,-28.572 12.79,-27.737 13.8,-26.727 13.8,-25.485 14.77,-24.515 15.057,-24.515 15.242,-24.33 D4.18
NetD4_19: D4.19 J2.5 | length 6.7
  Top Layer w0.254: J2.5@12.79,-30.732 12.79,-29.897 14.513,-28.174 14.513,-26.259 15.172,-25.6 D4.19
NetDS1_1: DS1.1 R4.1 | length 2
  Top Layer w0.254: R4.1 DS1.1
NetDS1_2: DS1.2 U1.14 | length 28
  Top Layer w0.254: DS1.2 27.65,-7.775 26.25,-6.375 26.25,-1.5 27.25,-0.5 41.75,-0.5 42.463,-1.213 42.463,-2.864 42.748,-3.149 42.896,-3.149 42.896,-3.297 U1.14
NetDS2_1: DS2.1 R5.1 | length 2
  Top Layer w0.254: R5.1 DS2.1
NetDS2_2: DS2.2 U1.7 | length 8.6
  Top Layer w0.254: DS2.2 33.125,-7.775 35.063,-5.837 U1.7
NetDS3_1: DS3.1 R6.1 | length 2
  Top Layer w0.254: DS3.1 60.75,-5.323 R6.1
NetDS4_2: DS4.2 R13.2 | length 2.7
  Top Layer w0.254: DS4.2 48.485,-26.65 R13.2
NetDS5_2: DS5.2 R15.2 | length 2.6
  Top Layer w0.254: R15.2 53,-26.5 54.38,-26.5 DS5.2
NetJ1_1: J1.1 L1.1 | length 2.4
  Top Layer w1: J1.1@42.604,-15 J1.1 44.296,-15 L1.1
NetJ1_2: J1.2 R7.1 | length 5.9
  Top Layer w0.254: J1.2@40.104,-15.49 40.26,-15.49 40.5,-15.25 41.25,-14.5 41.25,-10.8 R7.1
NetJ1_3: J1.3 R8.1 | length 3.3
  Top Layer w0.254: R8.1 39.1,-11.85 J1.3@40.104,-12.854 ; J1.3@40.104,-13.49 J1.3@40.104,-12.854 ; J1.3 J1.3@40.104,-12.854
NetL1_2: L1.2 R1.1 | length 3.1
  Top Layer w0.254: R1.1 45.55,-17.7 46.305,-16.945 L1.2
NetL2_2: L2.2 U4.3 | length 2.6
  Top Layer w1: U4.3 57.7,-10 L2.2
NetR7_2: R7.2 U1.9 | length 3.3
  Top Layer w0.254: R7.2 41.85,-8.433 43.811,-6.472 U1.9
NetR8_2: R8.2 U1.8 | length 2.3
  Top Layer w0.254: R8.2 39.1,-6.548 U1.8
NRFD: D2.30 U3.4 | length 13.7
  Top Layer w0.254: U3.4 35.975,-24.725 36.422,-25.172 36.422,-33.672 38.044,-35.294 D2.30
REN: D2.33 U3.9 | length 21.9
  Top Layer w0.254: U3.9 35.038,-21.613 35.948,-21.613 38.578,-24.243 38.578,-27.078 40.75,-29.25 40.75,-38.75 40.396,-39.104 D2.33
RX: D2.34 R2.1 U1.1 | length 62.2
  Top Layer w0.254: R2.1 32.2,-1.75 37.25,-1.75 37.527,-2.027 U1.1 v2(41,-2.027) ; v2(37.2,-7.3) 37.2,-16.2 38.463,-17.463 41.612,-17.463 43.537,-19.389 43.537,-22.112 43.186,-22.463 43.186,-25.884 v3(40.75,-28.32) ; 38.224,-40.374 D2.34 40.201,-40.374 40.36,-40.215 v3(40.36,-40.075) ; v3(41.849,-31.349) 41.578,-31.349 41.578,-35.828 v3(43.5,-37.75)
  Bottom Layer w0.254: v2(37.2,-7.3) 37.2,-5.827 v2(41,-2.027) ; v3(40.36,-40.075) 40.522,-39.913 41.777,-39.913 41.798,-39.935 43.165,-39.935 43.5,-39.6 v3(43.5,-37.75) ; v3(40.75,-28.32) 41.849,-29.419 v3(41.849,-31.349)
SRQ: D2.27 U3.7 | length 11.8
  Top Layer w0.254: U3.7 35.94,-22.775 37.75,-24.585 37.75,-31.234 38,-31.484 D2.27
TE: D2.16 D3.1 D4.1 DS5.1 | length 67.9
  Top Layer w0.254: D3.1 25.1,-50.897 25.703,-51.5 31,-51.5 31.438,-51.062 31.708,-50.792 31.708,-50.127 31.676,-50.094 31.676,-39.256 30.112,-37.693 30.112,-36.175 25.1,-31.163 D4.1 ; v2(42.75,-39.02) 43.354,-39.02 43.374,-39 51.034,-31.34 53.232,-31.34 53.443,-31.129 D2.16 53.443,-28.887 DS5.1
  Bottom Layer w0.254: v2(31.438,-39) 42.73,-39 v2(42.75,-39.02)
TX: D2.35 R3.1 U1.4 | length 61.9
  Top Layer w0.254: R3.1 28.55,-1.95 29.25,-1.25 41.053,-1.25 41.587,-1.784 41.587,-3.596 ; U1.4 41.25,-3.932 41.587,-3.596 ; D2.35 39.996,-41.644 40.947,-40.693 40.947,-39.303 41.164,-39.086 41.164,-28.736 43.6,-26.3 43.6,-22.634 43.951,-22.283 43.951,-16.701 v2(43.5,-16.25) ; v3(41.587,-6.25) 41.587,-3.596 ; v3(44.174,-7.25) 44.25,-7.326 v3(44.25,-13.5)
  Bottom Layer w0.254: v3(41.587,-6.25) 43.174,-6.25 v3(44.174,-7.25) ; v2(43.5,-16.25) 43.85,-16.25 44.174,-15.926 44.174,-14.1 44.25,-14.024 v3(44.25,-13.5)
pads on no net: D2.4 D2.5 D2.6 D2.7 D2.17 D2.18 D2.19 D2.20 D2.21 D2.22 D2.32 D2.PAD U1.2 U1.6 U1.10 U1.15 U1.16

## Polygon pours and split planes (outlines as drawn)
3.3V on Top Layer "Top Layer-3.3V" (solid, pour order 4): 64,-55 31.75,-55 31.75,0 64,0
5V on Top Layer "Top Layer-5V" (solid, pour order 0): 31.75,-23.5 31.75,0 0,0 0,-55 31.75,-55 31.998,-55
GND on Bottom Layer "Bottom Layer-GND" (solid, pour order 8): 64,0 0,0 0,-55 64,-55

## Keep-outs
Keep-Out Layer:
  rectangle: 36.75,-55 64,-47.5

## Silkscreen, mask and mechanical layers (free items; w line width, h text height)
Bottom Overlay:
  text "WGPIB 07.07.2018 rev.0" at 68.75,-50 h2
  text "CERN OHL v1.2" at 72,-52 h2
  text "github: sixtemesseven/WGPIB" at 67.5,-54.75 h2
Mechanical 11:
  lines w0.254: 0,0 64,0
Mechanical 1:
  lines w0.254: 0,-55 0,0 0,0.1 64,0.1 64,0 64,-55 0,-55

## Text inside footprints (layer, text, board x,y; h text height)
D2: Top Overlay "ANTENNA KEEP OUT" at 53.498,-51.494 h1.2 r180; Top Overlay "1" at 59.248,-46.744 h1.2 r180; Top Overlay "14" at 55.498,-27.494 h1.2 r180; Top Overlay "38" at 37.748,-46.494 h1.2 r180